# Altium PCB pk2socket.PcbDoc
Units mil, origin at the board's own origin, x right, y up, seen from the top; angles counter-clockwise.
Board outline 1625 x 2525 mil, 2 copper layers (Top Layer, Bottom Layer); 9 components, 7 nets, 112 pads, 0 vias.
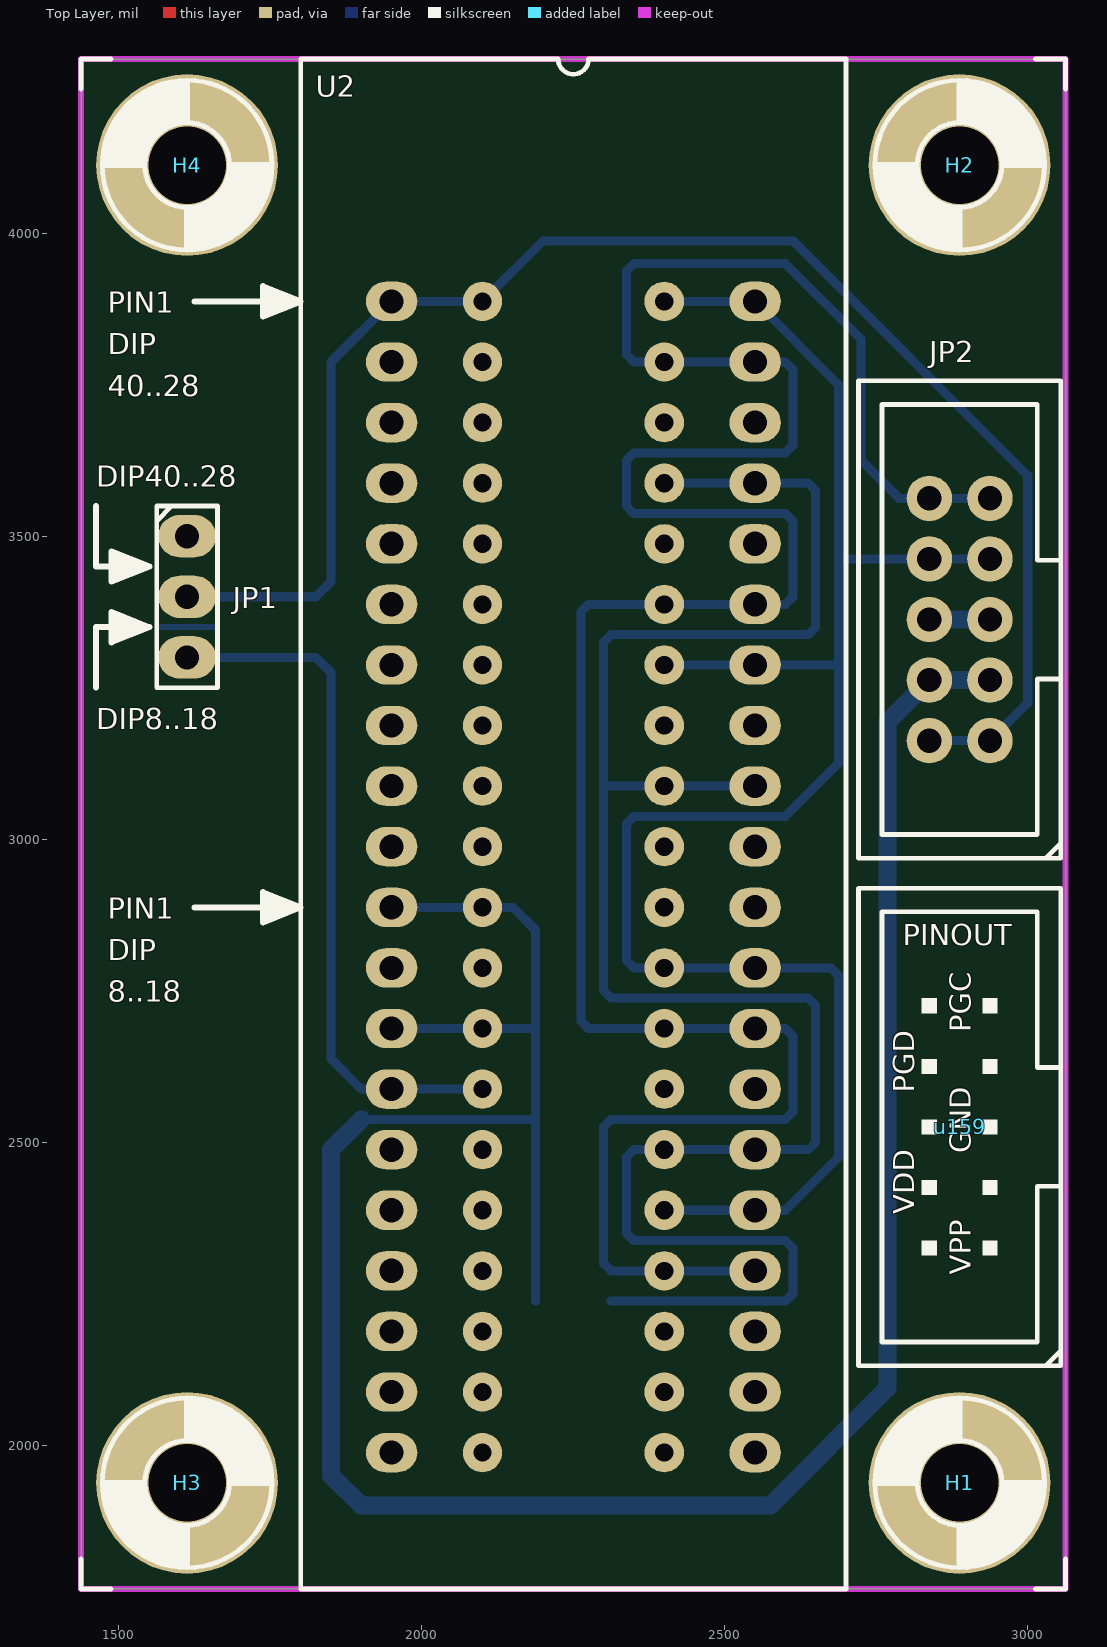
[diagram p0: Top Layer view]
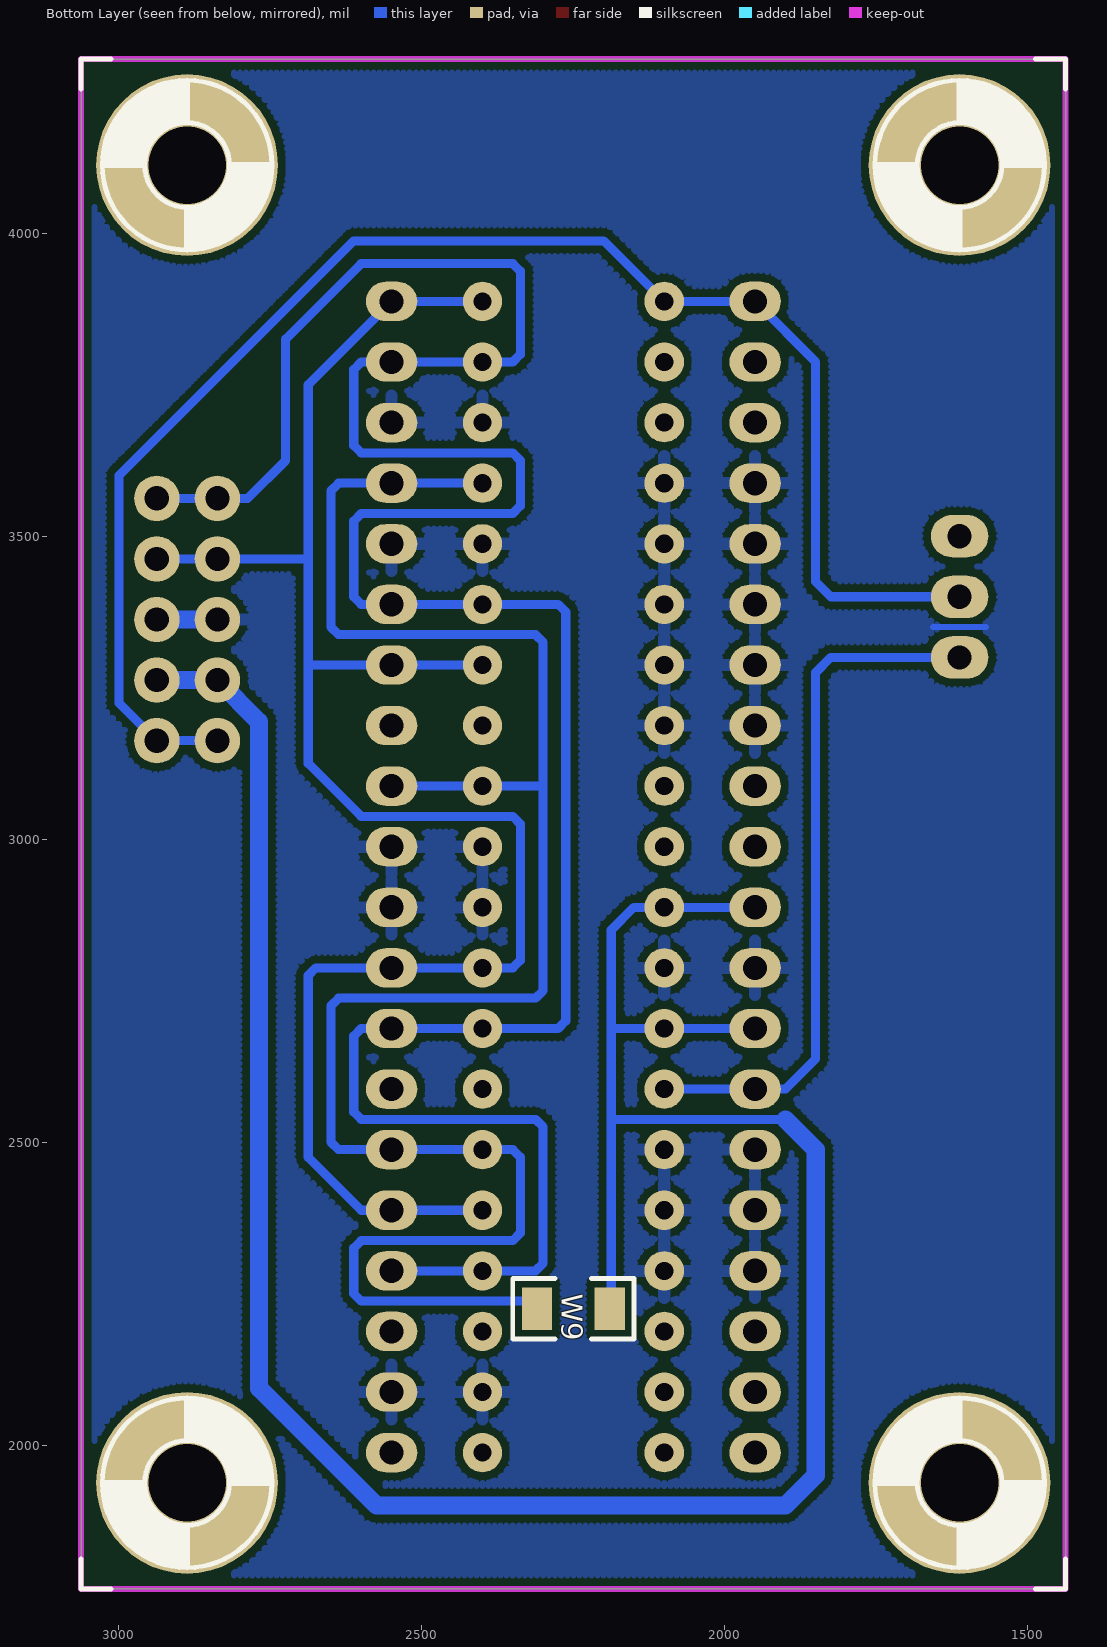
[diagram p1: Bottom Layer view, seen from below]

## Layer stack, top to bottom
Top Layer: signal copper 1.4
Dielectric: dielectric 12.6, FR-4, Dk 4.8
Bottom Layer: signal copper 1.4

## Board outline
1437.5,1762.5 3062.5,1762.5 3062.5,4287.5 1437.5,4287.5

## Design rules (kind name [scope] priority, off if disabled: settings)
Clearance "gnd Clearance" [All vs (InNet('GND'))] p1: gap=12.5
Clearance [All] p2: gap=10
FabricationTestPointUsage TestPointUsage [All] p1: valid=0 allowmultiple=FALSE
FabricationTestpoint Testpoint [All] p1: side=3 testpointundercomponent=TRUE minsize=40 maxsize=100 preferedsize=60 minholesize=0 maxholesize=40 preferedholesize=32 testpointgrid=1 allowsidetop=TRUE allowsidebottom=TRUE usegrid=TRUE gridtolerance=0.01
PolygonConnect [All] p1: connectstyle=Relief reliefconductorwidth=20 reliefentries=4 polygonreliefangle="90 Angle"
RoutingVias [All] p1: holewidth=28 width=50 viastyle="Through Hole" minholewidth=28 minwidth=50 maxholewidth=28 maxwidth=50
SilkscreenOverComponentPads [All] p1: minsilkscreentomaskgap=10
SolderMaskExpansion [All] p1: expansion=4
Width [All] p1: maxlimit=100 minlimit=10 preferedwidth=30 toplayer_prefwidth=15 minimp=50.000000 maximp=50.000000 favimp=50.000000
25 further rules are at their usual default settings.

## Classes and differential pairs
component class "USB PROGRAMMER": H1 H2 H3 H4 JP1 JP2 U2 W9

## Components (designator, comment, footprint, x,y, rotation, side; value= is the part's Value field where it differs from the comment)
H1 "Agujero de montaje" agujero 2887.5,1937.5 r270 top locked
H2 "Agujero de montaje" agujero 2887.5,4112.5 r0 top locked
H3 "Agujero de montaje" agujero 1612.5,1937.5 r180 top locked
H4 "Agujero de montaje" agujero 1612.5,4112.5 r90 top locked
JP1 "JP2" hdr3x1 1612.5,3500 r270 top locked
JP2 "Header5x1" IDC5x2#1 2887.5,3362.5 r90 top locked
U2 "SOCKET DIP40" ZIF40 2250,2987.5 r0 top locked
u159 "Comment" IDC5x2#2 2887.5,2525 r90 top locked
W9 "CABLE" 1206NP 2250,2225 r0 bottom locked

## Footprints (in the part's own frame and the unit in brackets; to place one, negate y for a bottom-side part, rotate by r counter-clockwise, add the part's x,y. Pads: shape width x height; smd on the part's side, far side on the other; paste and mask are expansions set on the pad)
1206NP [mil]
  rect 50x70 smd: 1(-60,0) 2(60,0)
  silkscreen extent -100,-50 100,50
agujero [mm] "AGUJERO DE MONTAJE"
  round 7.62 hole 3.25: 1(0,0)
  silkscreen extent -3.56,-3.56 4.44,4.45
hdr3x1 [mil] "HEADER 3x1"
  oval 70x95 hole 40: 1(0,0) 2(100,0) 3(200,0)
  silkscreen extent -50,-50 250,50
IDC5x2#1 [mil]
  round 75 hole 40: 1(-200,-50) 2(-200,50) 3(-100,-50) 4(-100,50) 5(0,-50) 6(0,50) 7(100,-50) 8(100,50) 9(200,-50) 10(200,50)
  silkscreen extent -394,-167 394,167
IDC5x2#2 [mil]
  silkscreen extent -394,-167 394,167
ZIF40 [mil]
  oval 85x65 hole 40: 1(-300,900) 2(-300,800) 3(-300,700) 4(-300,600) 5(-300,500) 6(-300,400) 7(-300,300) 8(-300,200) 9(-300,100) 10(-300,0) 11(-300,-100) 12(-300,-200) 13(-300,-300) 14(-300,-400) 15(-300,-500) 16(-300,-600) 17(-300,-700) 18(-300,-800) 19(-300,-900) 20(-300,-1000) 21(300,-1000) 22(300,-900) 23(300,-800) 24(300,-700) 25(300,-600) 26(300,-500) 27(300,-400) 28(300,-300) 29(300,-200) 30(300,-100) 31(300,0) 32(300,100) 33(300,200) 34(300,300) 35(300,400) 36(300,500) 37(300,600) 38(300,700) 39(300,800) 40(300,900)
  silkscreen extent -450,-1225 450,1300

## Part data
JP1: "Jumper 3 contactos"
JP2: library part Header6x1, "Header 6x1"
U2: "Socket dip40"
W9: "Cable"

## Free pads (board coordinates)
  rect 40x40 on Mech2: 0(1650,3300) 0(1650,3400) 0(1650,3500) 0(2837.5,2987.5) 0(2837.5,3087.5) 0(2837.5,3187.5) 0(2837.5,3287.5) 0(2837.5,3387.5) 0(2937.5,2987.5) 0(2937.5,3087.5) 0(2937.5,3187.5) 0(2937.5,3287.5) 0(2937.5,3387.5)
  round 65 hole 30: 0(2100,1987.5) 0(2100,2087.5) 0(2100,2187.5) 0(2100,2287.5) 0(2100,2387.5) 0(2100,2587.5) 0(2100,2687.5) 0(2100,2887.5) 0(2100,2987.5) 0(2100,3087.5) 0(2100,3687.5) 0(2100,3787.5) 0(2100,3887.5) 1(2100,2487.5) 1(2100,2787.5) 1(2100,3187.5) 1(2100,3287.5) 1(2100,3387.5) 1(2100,3487.5) 1(2100,3587.5) 1(2400,1987.5) 1(2400,2087.5) 1(2400,2187.5) 1(2400,2287.5) 1(2400,2387.5) 1(2400,2487.5) 1(2400,2587.5) 1(2400,2687.5) 1(2400,2787.5) 1(2400,2887.5) 1(2400,2987.5) 1(2400,3087.5) 1(2400,3187.5) 1(2400,3287.5) 1(2400,3387.5) 1(2400,3487.5) 1(2400,3587.5) 1(2400,3687.5) 1(2400,3787.5) 1(2400,3887.5)

## Nets (pads, with @x,y where several pads share a name; then routed paths per layer and width w, separated by ;. In a path a pad name is that pad's centre, name@x,y a point inside that pad or via, vN(x,y) a via of type N, cw(c..) or ccw(c..) an arc to the next point about the centre after c; other vN are vias at no path point)
GND: JP2.5 JP2.6 pad.0@2100,2287.5 pad.0@2100,2387.5 pad.1@2100,2487.5 pad.1@2100,2787.5 pad.1@2100,3187.5 pad.1@2100,3287.5 pad.1@2100,3387.5 pad.1@2100,3487.5 pad.1@2100,3587.5 pad.1@2400,2087.5 pad.1@2400,2887.5 pad.1@2400,2987.5 pad.1@2400,3487.5 pad.1@2400,3687.5 U2.4 U2.5 U2.6 U2.7 U2.8 U2.12 U2.15 U2.16 U2.17 U2.22 U2.30 U2.31 U2.36 U2.38 | length 187.5
  Bottom Layer w10: 1568.75,3350 1656.25,3350
  Bottom Layer w30: JP2.6 JP2.5
PGC: JP2.9 JP2.10 pad.1@2400,2287.5 pad.1@2400,2687.5 pad.1@2400,3387.5 pad.1@2400,3787.5 U2.24 U2.28 U2.35 U2.39 | length 4525.2
  Bottom Layer w15: U2.24 2312.5,2287.5 2300,2300 2300,2525 2312.5,2537.5 2600,2537.5 2612.5,2550 2612.5,2675 2600,2687.5 2275,2687.5 2262.5,2700 2262.5,3375 2275,3387.5 2600,3387.5 2612.5,3400 2612.5,3525 2600,3537.5 2350,3537.5 2337.5,3550 2337.5,3625 2350,3637.5 2600,3637.5 2612.5,3650 2612.5,3775 2600,3787.5 2350,3787.5 2337.5,3800 2337.5,3937.5 2350,3950 2600,3950 2725,3825 2725,3625 2787.5,3562.5 JP2.9
PGD: JP2.7 JP2.8 pad.1@2400,2387.5 pad.1@2400,2787.5 pad.1@2400,3287.5 pad.1@2400,3887.5 U2.25 U2.29 U2.34 U2.40 | length 3107.5
  Bottom Layer w15: pad.1@2400,2387.5 2600,2387.5 2687.5,2475 2687.5,2775 2675,2787.5 2350,2787.5 2337.5,2800 2337.5,3025 2350,3037.5 2600,3037.5 2687.5,3125 2687.5,3287.5 ; pad.1@2400,3287.5 U2.34 2687.5,3287.5 ; pad.1@2400,3887.5 U2.40 2687.5,3750 2687.5,3462.5 ; JP2.7 JP2.8 2687.5,3462.5 ; 2687.5,3287.5 2687.5,3462.5
VDDTGT: JP2.3 JP2.4 pad.0@2100,2687.5 pad.0@2100,2887.5 U2.11 U2.13 W9.1 | length 4315.7
  Bottom Layer w15: 1900,2537.5 2187.5,2537.5 ; U2.13 2187.5,2687.5 ; U2.11 2150,2887.5 2187.5,2850 W9.1@2187.5,2237.5
  Bottom Layer w30: 1900,2537.5 1850,2487.5 1850,1950 1900,1900 2575,1900 2768.75,2093.75 2768.75,3193.75 JP2.4 JP2.3
VDDTGT2: pad.1@2400,2487.5 pad.1@2400,3087.5 pad.1@2400,3587.5 U2.26 U2.32 U2.37 W9.2 | length 3364.3
  Bottom Layer w15: 2300,3087.5 U2.32 ; W9.2@2312.5,2237.5 2600,2237.5 2612.5,2250 2612.5,2325 2600,2337.5 2350,2337.5 2337.5,2350 2337.5,2475 2350,2487.5 2637.5,2487.5 2650,2500 2650,2725 2637.5,2737.5 2312.5,2737.5 2300,2750 2300,3325 2312.5,3337.5 2637.5,3337.5 2650,3350 2650,3575 2637.5,3587.5 pad.1@2400,3587.5
VPP: JP1.2 JP2.1 JP2.2 pad.0@2100,3887.5 U2.1 | length 2567.1
  Bottom Layer w15: JP1.2 1825,3400 1850,3425 1850,3787.5 U2.1 2100,3887.5 2200,3987.5 2612.5,3987.5 3000,3600 3000,3225 JP2.1 JP2.2
VPP8-18: JP1.3 pad.0@2100,2587.5 U2.14 | length 1156.1
  Bottom Layer w15: JP1.3 1825,3300 1850,3275 1850,2637.5 1900,2587.5 U2.14 pad.0@2100,2587.5
pads on no net: H1.1 H2.1 H3.1 H4.1 JP1.1 U2.2 U2.3 U2.9 U2.10 U2.18 U2.19 U2.20 U2.21 U2.23 U2.27 U2.33

## Polygon pours and split planes (outlines as drawn)
GND on Mechanical 3 "Bottom Layer-GND" (hatched 45Degree grid 10 track 10, remove dead copper, pour order 4): 3025,1762.5 3025,4137.5 1475,4137.5 1475,1762.5
GND on Bottom Layer "Bottom Layer-No Net" (hatched 90Degree grid 10 track 10, remove dead copper, pour order 2): 3062.5,1762.5 3062.5,4287.5 1437.5,4287.5 1437.5,1762.5

## Keep-outs
Keep-Out Layer:
  lines w10: 3062.5,1762.5 3062.5,4287.5 ; 3062.5,1762.5 1437.5,1762.5 1437.5,4287.5 3062.5,4287.5 ; 3062.5,1762.5 3062.5,4287.5

## Silkscreen, mask and mechanical layers (free items; w line width, h text height)
Top Overlay:
  rectangle: 2925,2712.5 2950,2737.5
  rectangle: 2825,2712.5 2850,2737.5
  rectangle: 2825,2612.5 2850,2637.5
  rectangle: 2925,2612.5 2950,2637.5
  rectangle: 2825,2512.5 2850,2537.5
  rectangle: 2925,2512.5 2950,2537.5
  rectangle: 2825,2412.5 2850,2437.5
  rectangle: 2925,2412.5 2950,2437.5
  rectangle: 2825,2312.5 2850,2337.5
  rectangle: 2925,2312.5 2950,2337.5
  lines w10: 1462.5,3250 1462.5,3350 1550,3350 ; 1462.5,3550 1462.5,3450 1550,3450 ; 1493.75,3331.25 1493.75,3368.75 ; 1493.75,3431.25 1493.75,3468.75 ; 1500,3337.5 1500,3362.5 ; 1500,3437.5 1500,3462.5 ; 1506.25,3337.5 1506.25,3362.5 ; 1506.25,3437.5 1506.25,3462.5 ; 1512.5,3337.5 1512.5,3362.5 ; 1512.5,3437.5 1512.5,3462.5 ; 1518.75,3343.75 1518.75,3356.25 ; 1518.75,3443.75 1518.75,3456.25 ; 1525,3343.75 1525,3356.25 ; 1525,3443.75 1525,3456.25 ; 1625,2887.5 1800,2887.5 ; 1625,3887.5 1800,3887.5 ; 1743.75,2868.75 1743.75,2906.25 ; 1743.75,3868.75 1743.75,3906.25 ; 1750,2875 1750,2900 ; 1750,3875 1750,3900 ; 1756.25,2875 1756.25,2900 ; 1756.25,3875 1756.25,3900 ; 1762.5,2875 1762.5,2900 ; 1762.5,3875 1762.5,3900 ; 1768.75,2881.25 1768.75,2893.75 ; 1768.75,3881.25 1768.75,3893.75 ; 1775,2881.25 1775,2893.75 ; 1775,3881.25 1775,3893.75 ; 1550,3350 1487.5,3375 1487.5,3325 1550,3350 ; 1550,3450 1487.5,3475 1487.5,3425 1550,3450 ; 1800,2887.5 1737.5,2912.5 1737.5,2862.5 1800,2887.5 ; 1800,3887.5 1737.5,3862.5 1737.5,3912.5 1800,3887.5
  text "PIN1" at 1481.25,3868.75 h35
  text "DIP" at 1481.25,3800 h35
  text "40..28" at 1481.25,3731.25 h35
  text "DIP40..28" at 1462.5,3581.25 h35
  text "DIP8..18" at 1462.5,3181.25 h35
  text "PIN1" at 1481.25,2868.75 h35
  text "PINOUT" at 2793.75,2825 h35
  text "DIP" at 1481.25,2800 h35
  text "8..18" at 1481.25,2731.25 h35
  text "PGC" at 2906.25,2681.25 h35 r90
  text "PGD" at 2812.5,2581.25 h35 r90
  text "GND" at 2906.25,2481.25 h35 r90
  text "VDD" at 2812.5,2381.25 h35 r90
  text "VPP" at 2906.25,2281.25 h35 r90
Mechanical 1:
  lines w0: 1437.5,1762.5 1437.5,4287.5 3062.5,4287.5 3062.5,1762.5 1437.5,1762.5
  lines w10: 1475,1837.5 1475,1800 1512.5,1800 ; 1475,4212.5 1475,4250 1512.5,4250 ; 2012.5,2637.5 2050,2637.5 ; 2137.5,2237.5 2137.5,2250 ; 2150,2612.5 2150,2650 ; 2337.5,3137.5 2337.5,3287.5 ; 2375,2925 2375,2950 ; 2437.5,2637.5 2475,2637.5 2475,2587.5 ; 2437.5,3125 2437.5,3150 ; 2437.5,3225 2437.5,3250 ; 2437.5,3837.5 2500,3837.5 ; 2462.5,2437.5 2600,2437.5 ; 2475,3137.5 2475,3250 ; 2600,3225 2600,3250 ; 2612.5,3112.5 2612.5,3137.5 ; 2625,3875 2700,3800 ; 2637.5,3137.5 2637.5,3250 ; 2650,3625 2650,3737.5 ; 2887.5,3037.5 2887.5,3337.5 ; 2987.5,1800 3025,1800 3025,1837.5 ; 2987.5,4250 3025,4250 3025,4212.5
Mechanical 2:
  circle w10: c2250,1812.5 r59.06
  circle w10: c2250,4200 r59.06
  circle w10: c1612.5,1900 r65
  circle w10: c2887.5,1900 r65
  circle w10: c2887.5,4112.5 r65
  circle w10: c1612.5,4112.5 r65
  lines w10: 1818.75,4287.5 1437.5,4287.5 1437.5,1725 3062.5,1725 3062.5,4287.5 1875,4287.5 ; 1837.5,1725 cw(c1837.5,1762.5) 1800,1762.5 1800,4031.25 cw(c1818.75,4031.25) 1818.75,4050 ; 1875,1962.5 2162.5,1962.5 ; 1875,2012.5 2162.5,2012.5 ; 1875,2062.5 2162.5,2062.5 ; 1875,2112.5 2162.5,2112.5 ; 1875,2162.5 2162.5,2162.5 ; 1875,2212.5 2162.5,2212.5 ; 1875,2262.5 2162.5,2262.5 ; 1875,2312.5 2162.5,2312.5 ; 1875,2337.5 2162.5,2337.5 ; 1875,2362.5 2162.5,2362.5 ; 1875,2412.5 2162.5,2412.5 ; 1875,2462.5 2162.5,2462.5 ; 1875,2512.5 2162.5,2512.5 ; 1875,2562.5 2162.5,2562.5 ; 1875,2612.5 2162.5,2612.5 ; 1875,2662.5 2162.5,2662.5 ; 1875,2712.5 2162.5,2712.5 ; 1875,2762.5 2162.5,2762.5 ; 1875,2812.5 2162.5,2812.5 ; 1875,2862.5 2162.5,2862.5 ; 1875,2912.5 2162.5,2912.5 ; 1875,2962.5 2162.5,2962.5 ; 1875,3012.5 2162.5,3012.5 ; 1875,3062.5 2162.5,3062.5 ; 1875,3112.5 2162.5,3112.5 ; 1875,3162.5 2162.5,3162.5 ; 1875,3212.5 2162.5,3212.5 ; 1875,3262.5 2162.5,3262.5 ; 1875,3312.5 2162.5,3312.5 ; 1875,3362.5 2162.5,3362.5 ; 1875,3412.5 2162.5,3412.5 ; 1875,3462.5 2162.5,3462.5 ; 1875,3512.5 2162.5,3512.5 ; 1875,3537.5 2162.5,3537.5 ; 1875,3562.5 2162.5,3562.5 ; 1875,3612.5 2162.5,3612.5 ; 1875,3662.5 2162.5,3662.5 ; 1875,3712.5 2162.5,3712.5 ; 1875,3762.5 2162.5,3762.5 ; 1875,3812.5 2162.5,3812.5 ; 1875,3862.5 2162.5,3862.5 ; 1875,3912.5 2162.5,3912.5 ; 1912.5,4287.5 ccw(c1912.5,4250) 1875,4250 1875,4050 ; 2212.5,1812.5 2287.5,1812.5 ; 2212.5,4200 2287.5,4200 ; 2250,1775 2250,1850 ; 2250,4162.5 2250,4237.5 ; 2337.5,1962.5 2625,1962.5 ; 2337.5,2012.5 2625,2012.5 ; 2337.5,2062.5 2625,2062.5 ; 2337.5,2112.5 2625,2112.5 ; 2337.5,2162.5 2625,2162.5 ; 2337.5,2212.5 2625,2212.5 ; 2337.5,2262.5 2625,2262.5 ; 2337.5,2312.5 2625,2312.5 ; 2337.5,2337.5 2625,2337.5 ; 2337.5,2362.5 2625,2362.5 ; 2337.5,2412.5 2625,2412.5 ; 2337.5,2462.5 2625,2462.5 ; 2337.5,2512.5 2625,2512.5 ; 2337.5,2562.5 2625,2562.5 ; 2337.5,2612.5 2625,2612.5 ; 2337.5,2662.5 2625,2662.5 ; 2337.5,2712.5 2625,2712.5 ; 2337.5,2762.5 2625,2762.5 ; 2337.5,2812.5 2625,2812.5 ; 2337.5,2862.5 2625,2862.5 ; 2337.5,2912.5 2625,2912.5 ; 2337.5,2962.5 2625,2962.5 ; 2337.5,3012.5 2625,3012.5 ; 2337.5,3062.5 2625,3062.5 ; 2337.5,3112.5 2625,3112.5 ; 2337.5,3162.5 2625,3162.5 ; 2337.5,3212.5 2625,3212.5 ; 2337.5,3262.5 2625,3262.5 ; 2337.5,3312.5 2625,3312.5 ; 2337.5,3362.5 2625,3362.5 ; 2337.5,3412.5 2625,3412.5 ; 2337.5,3462.5 2625,3462.5 ; 2337.5,3512.5 2625,3512.5 ; 2337.5,3537.5 2625,3537.5 ; 2337.5,3562.5 2625,3562.5 ; 2337.5,3612.5 2625,3612.5 ; 2337.5,3662.5 2625,3662.5 ; 2337.5,3712.5 2625,3712.5 ; 2337.5,3762.5 2625,3762.5 ; 2337.5,3812.5 2625,3812.5 ; 2337.5,3862.5 2625,3862.5 ; 2337.5,3912.5 2625,3912.5 ; 2662.5,1725 ccw(c2662.5,1762.5) 2700,1762.5 ; 2662.5,4287.5 cw(c2662.5,4250) 2700,4250 2700,1762.5 ; 2700,1862.5 2700,1762.5 ; 3062.5,2793.75 2725,2793.75 2718.75,2793.75 2718.75,3581.25 3062.5,3581.25 ; 3062.5,3087.5 3018.75,3087.5 3018.75,2837.5 2762.5,2837.5 2762.5,3537.5 3018.75,3537.5 3018.75,3287.5 3062.5,3287.5 ; 1818.75,4050 1818.75,4600 ; 1818.75,4050 1875,4050 ; 1818.75,4600 cw(c1818.75,4668.75) 1750,4668.75 1750,4806.25 cw(c1818.75,4806.25) 1818.75,4875 1875,4875 cw(c1875,4806.25) 1943.75,4806.25 1943.75,4668.75 cw(c1875,4668.75) 1875,4600 ; 1818.75,4600 1875,4600 ; 1875,4050 1875,4600 ; 1600,3250 1700,3250 1700,3550 1600,3550 1600,3250 ; 1875,1950 1875,3925 2162.5,3925 2162.5,1950 1875,1950 ; 2337.5,1950 2337.5,3925 2625,3925 2625,1950 2337.5,1950

## Dimensions
3062.5,1762.5 to 1437.5,1762.5 on Top Overlay
1437.5,1762.5 to 1437.5,4287.5 on Top Overlay